# EAGLE board badgeBoardLayout (EAGLE 9.1.0)
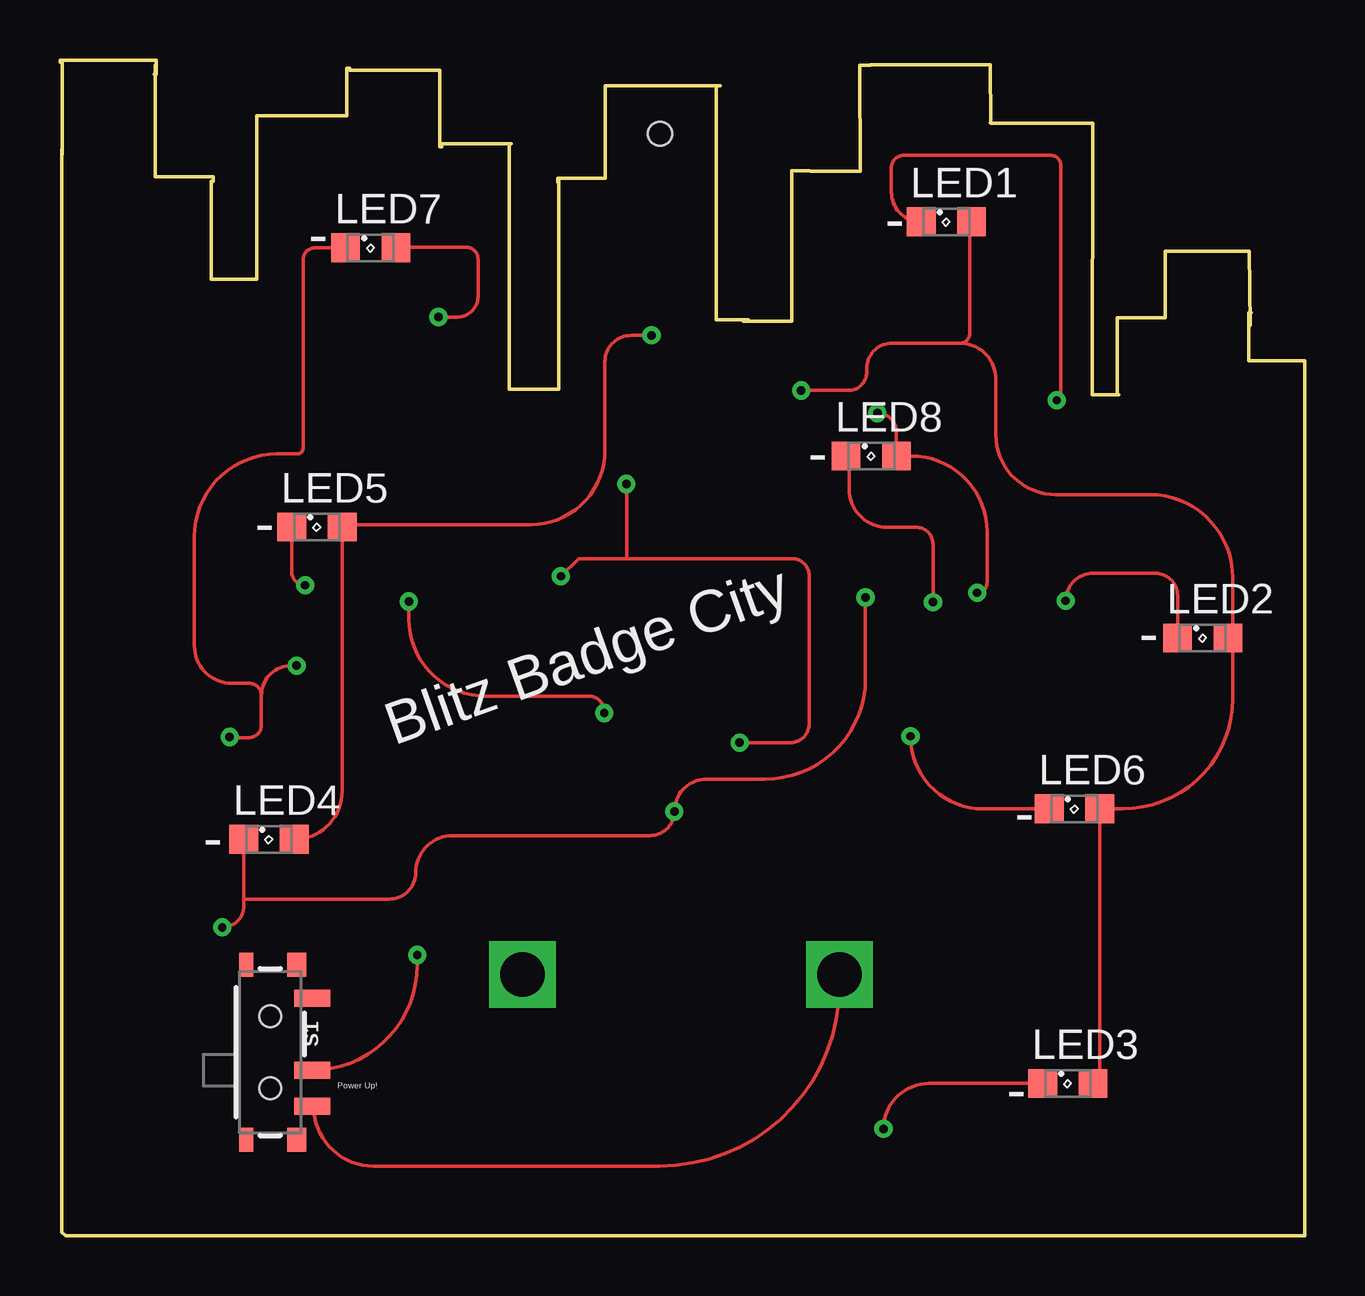
[diagram p0: board, top side]
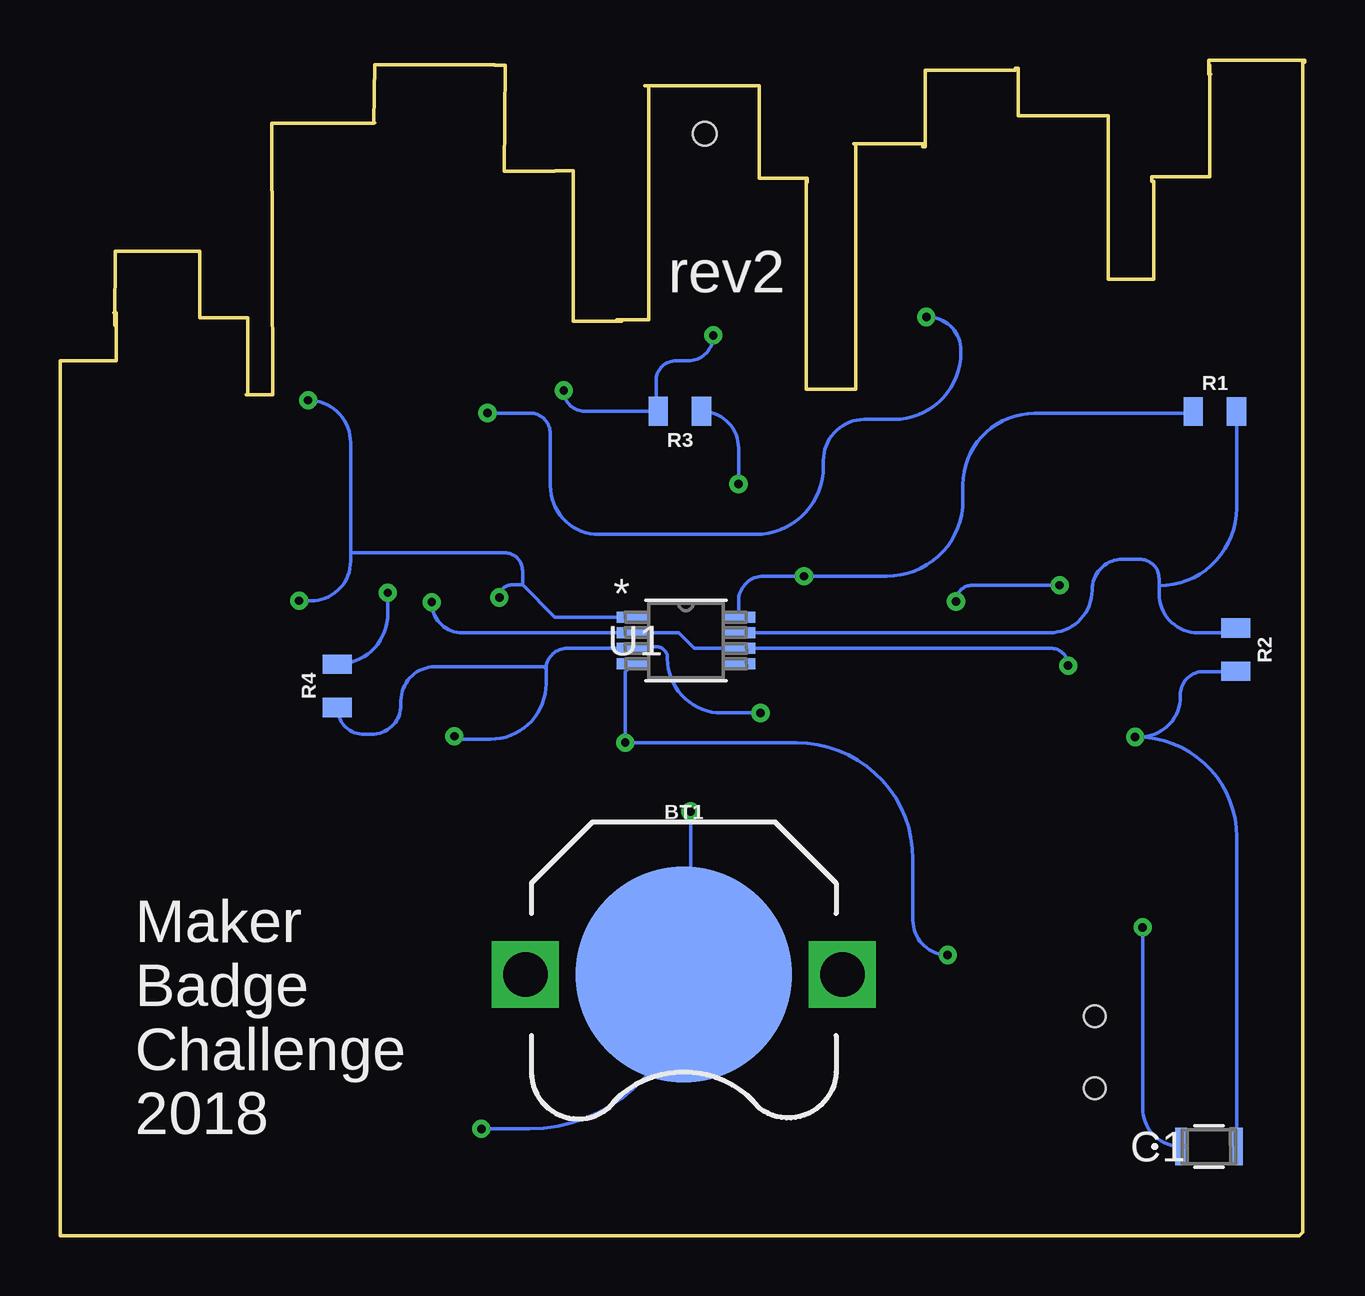
[diagram p1: board, bottom side, seen from below]

Size 51.87 x 48.99 mm. Coordinates in mm from the lower left corner, seen from the top.
Outline: 0.08,45.27 0.08,0.15 0.23,0 51.87,0 51.87,33.04
Outline: 49.6,37.95 49.56,41.02 46.06,41.02 46.06,38.26 44.05,38.26 44.05,35.05
Outline: 44.05,35.05 44.08,35.05
Outline: 44.08,35.05 44.12,35.05
Outline: 44.05,35.05 43,35.05 43.04,46.36 38.79,46.36
Outline: 38.79,46.36 38.75,46.38
Outline: 38.79,46.36 38.75,48.8 33.76,48.8 33.76,48.77 33.31,48.77 33.35,44.36 31.26,44.36 31.23,44.37 30.48,44.37 30.48,38.11 28.47,38.11
Outline: 51.86,32.97 51.86,36.46 49.53,36.46 49.53,38.47 49.64,38.47
Outline: 28.67,38.12 28.67,38.17 27.34,38.17 27.34,47.92 27.51,47.92 22.72,47.92 22.72,44.08 22.68,44.08 20.74,44.08 20.74,43.9
Outline: 20.78,43.99 20.78,35.28 20.27,35.28 18.71,35.28 18.71,35.32 18.71,45.5 18.8,45.5 15.91,45.5 15.91,45.37 15.83,45.37 15.83,48.56 12.07,48.56 12.07,48.65 11.94,48.65 11.94,46.66 9.74,46.66 8.19,46.66 8.19,39.85 6.3,39.85 6.3,40.02 6.3,43.95 6.38,43.95 6.38,44.12 4.23,44.12 3.97,44.12 3.97,48.78
Outline: 0.09,45.07 0.09,48.91 0,48.91 0,48.99 4.01,48.99 4.01,48.39 3.92,48.39
Outline: 44.08,35.05 44.05,35.09 44.05,35.56
Copper layers (1*16): Top 0.035mm / dielectric 1.5mm / Bottom 0.035mm
Design rules "default": minimum track width 6mil, minimum drill 0.35mm, track to track 6mil, track to pad 6mil, pad to pad 6mil, via to via 6mil, smd to smd 6mil, copper to edge 40mil, drill to drill 6mil, minimum pad ring 10mil, minimum via ring 8mil, stop-mask expansion 4mil, vias tented up to drill 0mil, thermal gap 10mil
Holes 1 mm at 25.01,45.92

## Footprints (pad centres in the part's own frame; a part is rotated, then mirrored left to right if it is on the bottom)
BATTCON_12MM_PTH = smd 9 x 9: GND 0,0 | drill 1.854 square: VCC@1 6.604,0; VCC@2 -6.604,0
CAP_2012-M = smd 0.508 x 1.549: 1 -1.156,0; 2 1.156,0
SML0805 = smd 1.2 x 1.2: A 1.05,0; C -1.05,0
0805 = smd 0.8 x 1.2: 1 -0.9,0; 2 0.9,0
SWITCH_SPST_SMD_A = smd 0.7 x 1.5: 1 -2.25,-1.75; 2 -0.75,-1.75; 3 2.25,-1.75 | smd 1 x 0.6: GND1 -3.65,1; GND3 3.65,1 | smd 1 x 0.8: GND2 -3.65,-1.1; GND4 3.65,-1.1 | hole 0.9: -1.5,0; 1.5,0
MUA08A = smd 1.372 x 0.457: 1 -2.197,0.975; 2 -2.197,0.325; 3 -2.197,-0.325; 4 -2.197,-0.975; 5 2.197,-0.975; 6 2.197,-0.325; 7 2.197,0.325; 8 2.197,0.975

## Placement (x,y rotation side)
BT1  [BATTCON_12MM_PTH]  25.88,10.89 180 bottom
C1  100uF  [CAP_2012-M]  3.99,3.72 0 bottom
LED1  [SML0805]  36.93,42.25 0 top
LED2  [SML0805]  47.61,24.91 0 top
LED3  [SML0805]  41.99,6.35 0 top
LED4  [SML0805]  8.71,16.52 0 top
LED5  [SML0805]  10.71,29.53 0 top
LED6  [SML0805]  42.27,17.79 0 top
LED7  [SML0805]  12.95,41.17 0 top
LED8  [SML0805]  33.8,32.49 0 top
R1  1K  [0805]  3.75,34.35 0 bottom
R2  10K  [0805]  2.88,24.42 270 bottom
R3  220  [0805]  26.04,34.36 180 bottom
R4  220  [0805]  40.32,22.92 90 bottom
S1  [SWITCH_SPST_SMD_A]  8.76,7.65 90 top
U1  LMC555CMM/NOPB  [MUA08A]  25.79,24.81 0 bottom

## Library data of the parts
BT1 = SparkFun-Batteries; PROD_ID: BATT-08315; SF_SKU: PRT-07948
C1 = 0805cap; MANUFACTURER_PART_NUMBER: C2012C0G1H103J060AA; VENDOR: TDK
LED1-LED8 = led
R1-R4 = SparkFun-Resistors; PROD_ID: RES-11622
S1 = SparkFun-Switches; PROD_ID: SWCH-10651; SF_SKU: COM-10860
U1 = lmc555_smd; MANUFACTURER_PART_NUMBER: LMC555CMMNOPB; VENDOR: Texas Instruments

## Nets
N$1: C1.2 LED7.C LED8.C R2.2 U1.2 U1.6
N$2: R1.2 R2.1 U1.7
N$3: BT1.GND C1.1 LED1.C LED2.C LED3.C LED4.C U1.1
N$4: R1.1 R3.1 S1.2 U1.4 U1.8
N$5: LED1.A LED2.A LED3.A LED4.A LED5.A LED6.A R3.2
N$6: LED5.C LED6.C R4.1 U1.3
N$7: LED7.A LED8.A R4.2
N$8: BT1.VCC@1 S1.1

## Tracks (layer width: path | path; a pad name or v marks a point on that pad's centre or on a via)
N$1  (via drill 0.35)
  Top 0.152: v36.38,26.4 36.38,28.81 arc90 35.67,29.52 34.47,29.52 arc-90 32.88,31.11 32.88,32.36 arc90 LED8.C | LED7.C 10.63,41.17 arc90 10.13,40.66 10.13,32.81 arc-90 9.89,32.58 9.04,32.58 arc90 5.6,29.14 5.6,24.58 arc90 7.16,23.02 7.89,23.02 arc-90 8.39,22.52 | 8.39,22.52 8.39,21.29 arc-90 7.86,20.76 7.1,20.76 arc-90 v7.07,20.79 | 8.39,22.52 | 8.39,22.52 arc-90 9.63,23.76 v9.86,23.76
  Bottom 0.152: v36.38,26.4 arc-90 35.11,25.13 U1.2 26.09,25.13 25.44,24.48 U1.6 10.59,24.48 arc90 v9.86,23.76 | v7.07,20.79 7,20.79 | 7,20.79 6.87,20.79 arc-90 5.19,22.46 5.19,22.53 arc90 4.21,23.51 2.89,23.51 arc-90 R2.2 | 7,20.79 arc90 2.84,16.62 C1.2
N$2
  Bottom 0.152: U1.7 10.63,25.13 arc-90 8.87,26.89 8.87,26.92 arc90 7.59,28.19 6.88,28.19 arc90 6.07,27.39 6.07,27.09 | 6.07,27.09 6.07,26.75 arc-90 4.46,25.13 3.07,25.13 arc-90 R2.1 | R1.2 2.85,30.32 arc90 6.07,27.09
N$3  (via drill 0.35)
  Top 0.152: LED1.C arc-90 34.64,43.49 34.64,44.52 arc-90 35.14,45.02 41.29,45.02 arc-90 41.7,44.6 41.7,34.81 arc90 41.7,34.81 v41.53,34.81 | v41.9,26.46 arc-90 43.05,27.61 45.64,27.61 arc-90 46.56,26.68 LED2.C | v33.56,26.6 33.56,23.22 arc-90 29.37,19.03 26.94,19.03 arc90 v25.6,17.68 arc-90 24.59,16.68 16.36,16.68 arc90 14.82,15.13 arc-90 13.72,14.03 7.66,14.03 | LED4.C 7.66,14.03 | 7.66,14.03 7.66,13.73 arc-90 6.81,12.88 6.78,12.88 arc90 v6.76,12.86 | v34.31,4.46 arc-90 36.2,6.35 LED3.C
  Bottom 0.152: v41.53,34.81 arc90 39.76,33.04 39.76,28.47 | 39.76,28.47 39.76,28.11 | 39.76,28.11 arc90 41.4,26.46 v41.9,26.46 | 39.76,28.11 arc90 39.76,28.11 | U1.1 31.26,25.78 32.6,27.12 | 32.6,27.12 33.04,27.12 arc-90 v33.56,26.6 | v25.6,17.68 25.6,11.17 arc90 BT1.GND arc90 32.31,4.46 v34.31,4.46 | v6.76,12.86 6.76,5.33 arc-90 C1.1 | 32.6,27.12 32.6,27.71 arc-90 33.36,28.47 39.76,28.47 | v34.31,4.46 34.33,4.46 v34.31,4.46
N$4  (via drill 0.35)
  Top 0.152: v20.87,27.48 21.61,28.22 23.62,28.22 | 23.62,28.22 30.5,28.22 arc-90 31.22,27.5 31.22,21.33 arc-90 30.44,20.55 v28.32,20.55 | v23.6,31.33 arc-90 23.62,31.31 23.62,28.22 | S1.2 arc90 14.88,11.28 v14.88,11.7
  Bottom 0.152: 21,27.48 v20.87,27.48 | U1.4 28.32,23.5 v28.32,20.55 21.65,20.55 | R3.1 arc90 23.6,32.82 v23.6,31.33 | R1.1 arc90 4.73,34.27 11.27,34.27 arc-90 14.25,31.29 14.25,30.65 arc90 17.42,27.48 21,27.48 | 21.65,20.55 | 21.65,20.55 21.18,20.55 arc90 16.33,15.7 16.33,14.45 | 16.33,14.45 16.33,13.83 | U1.8 arc90 U1.8 23.6,26.44 arc90 22.56,27.48 21,27.48 | v14.88,11.7 arc90 16.33,13.15 16.33,14.45
N$5  (via drill 0.35)
  Top 0.152: LED1.A arc90 37.91,42.18 37.91,37.61 arc-90 37.49,37.2 | 37.49,37.2 34.67,37.2 arc90 33.61,36.14 33.61,35.99 arc-90 32.85,35.23 v30.88,35.23 | 37.49,37.2 arc-90 38.99,35.7 38.99,34.24 | 38.99,34.24 38.99,34.14 | 48.81,25.06 48.71,24.96 | 48.71,24.96 LED2.A | LED3.A 43.33,6.63 LED6.A 44.28,17.79 arc90 48.87,22.38 48.87,25.11 arc90 48.86,25.11 | v24.65,37.52 23.8,37.52 arc90 22.71,36.43 22.71,32.72 arc-90 19.62,29.64 11.86,29.64 arc90 LED5.A 11.76,18.52 arc-90 LED4.A | 38.99,34.24 | 38.99,34.24 38.99,33.38 arc90 41.48,30.89 45.4,30.89 arc-90 48.86,27.42 48.86,25.11 | 48.86,25.11 arc-90 48.71,24.96
  Bottom 0.152: v30.88,35.23 arc-90 30.02,34.36 27.03,34.36 | 27.03,34.36 R3.2 | v24.65,37.52 arc90 25.71,36.46 26.21,36.46 arc-90 27.03,35.64 27.03,34.36
N$6  (via drill 0.35)
  Top 0.152: LED5.C 9.66,27.67 arc90 v10.21,27.11 | v14.54,26.43 14.54,25.7 arc90 17.74,22.49 22.03,22.49 arc-90 22.68,21.85 v22.68,21.79 | LED6.C 38.46,17.79 arc-90 v35.44,20.82
  Bottom 0.152: v10.21,27.11 13.86,27.11 arc-90 v14.54,26.43 | v22.68,21.79 24.3,21.79 arc90 26.56,24.05 26.56,24.08 arc-90 27.03,24.55 27.92,24.55 arc-90 U1.3 30.74,24.48 arc-90 31.62,23.61 | 31.62,23.61 31.62,23.01 arc90 33.93,20.7 35.32,20.7 arc90 v35.44,20.82 | 31.62,23.61 31.72,23.71 36.25,23.71 arc-90 37.66,22.3 37.66,22.12 arc90 38.89,20.89 39.2,20.89 arc90 R4.1
N$7  (via drill 0.35)
  Top 0.152: LED8.A 34.89,32.53 | LED8.A 34.85,33.49 arc90 v34.06,34.28 | v15.77,38.28 16.56,38.28 arc90 17.42,39.14 17.42,40.7 arc90 16.92,41.2 14.02,41.2 arc90 LED7.A | LED8.A 35.47,32.49 arc-90 38.62,29.34 38.62,27.21 arc-90 v38.21,26.8
  Bottom 0.152: v34.06,34.28 32.29,34.28 arc90 31.44,33.43 31.44,31.25 arc-90 29.41,29.23 22.88,29.23 arc-90 20.06,32.05 20.06,32.31 arc90 18.36,34.02 17.12,34.02 arc-90 14.33,36.81 14.33,36.9 arc-90 15.71,38.28 v15.77,38.28 | 38.21,26.77 v38.21,26.8 38.21,25.92 arc90 R4.2
N$8
  Top 0.152: S1.1 10.57,5.4 arc90 13.06,2.91 24.97,2.91 arc90 32.48,10.42 BT1.VCC@1

## Text on the board
tPlace: - | - | - | - | Blitz Badge City | - | - | - | Power Up! | -
bPlace: rev2 | Maker / Badge / Challenge / 2018